# Altium PCB ValentinesFlower.PcbDoc
Units mm, origin at the board's own origin, x right, y up, seen from the top; angles counter-clockwise.
Board outline 50 x 40 mm, 2 copper layers (Top Layer, Bottom Layer); 15 components, 14 nets, 113 pads, 9 vias.
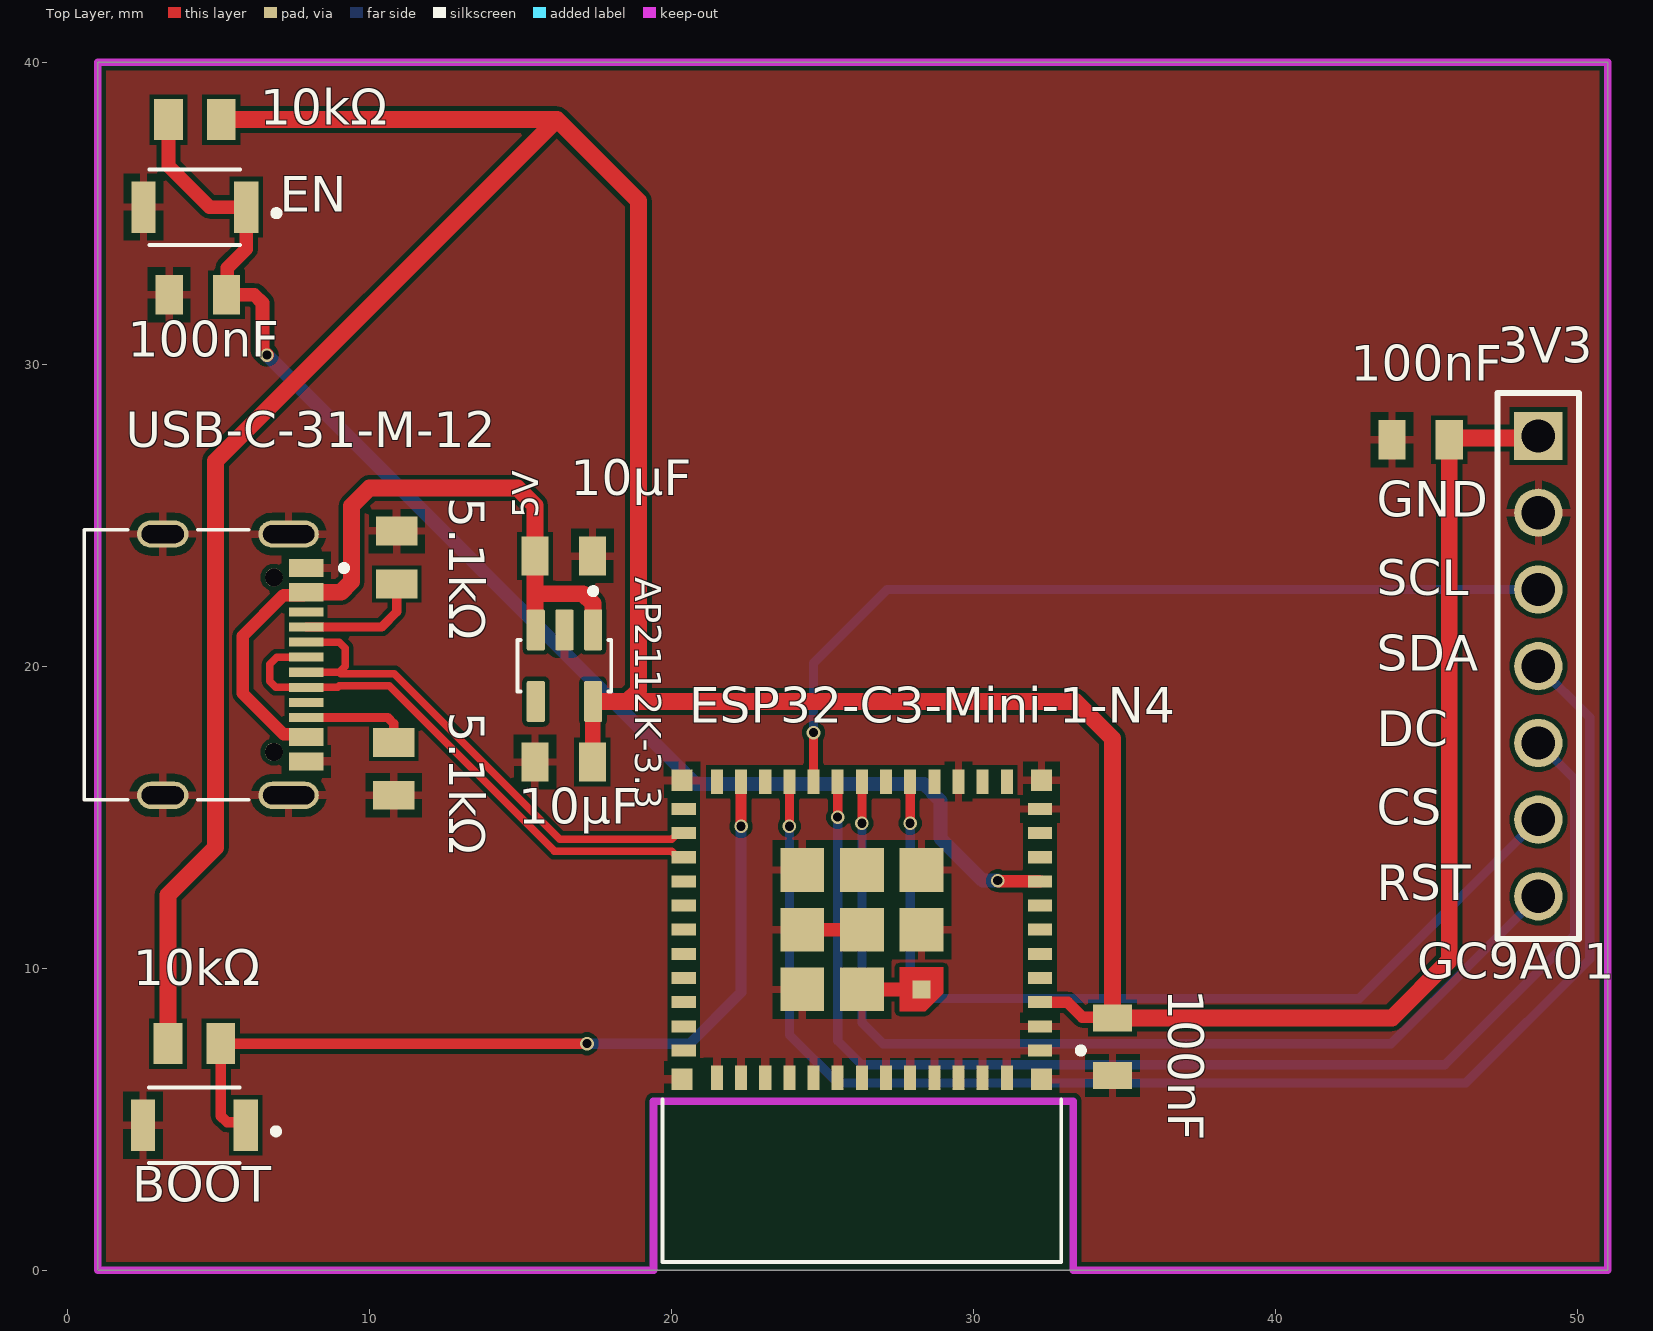
[diagram p0: Top Layer view]
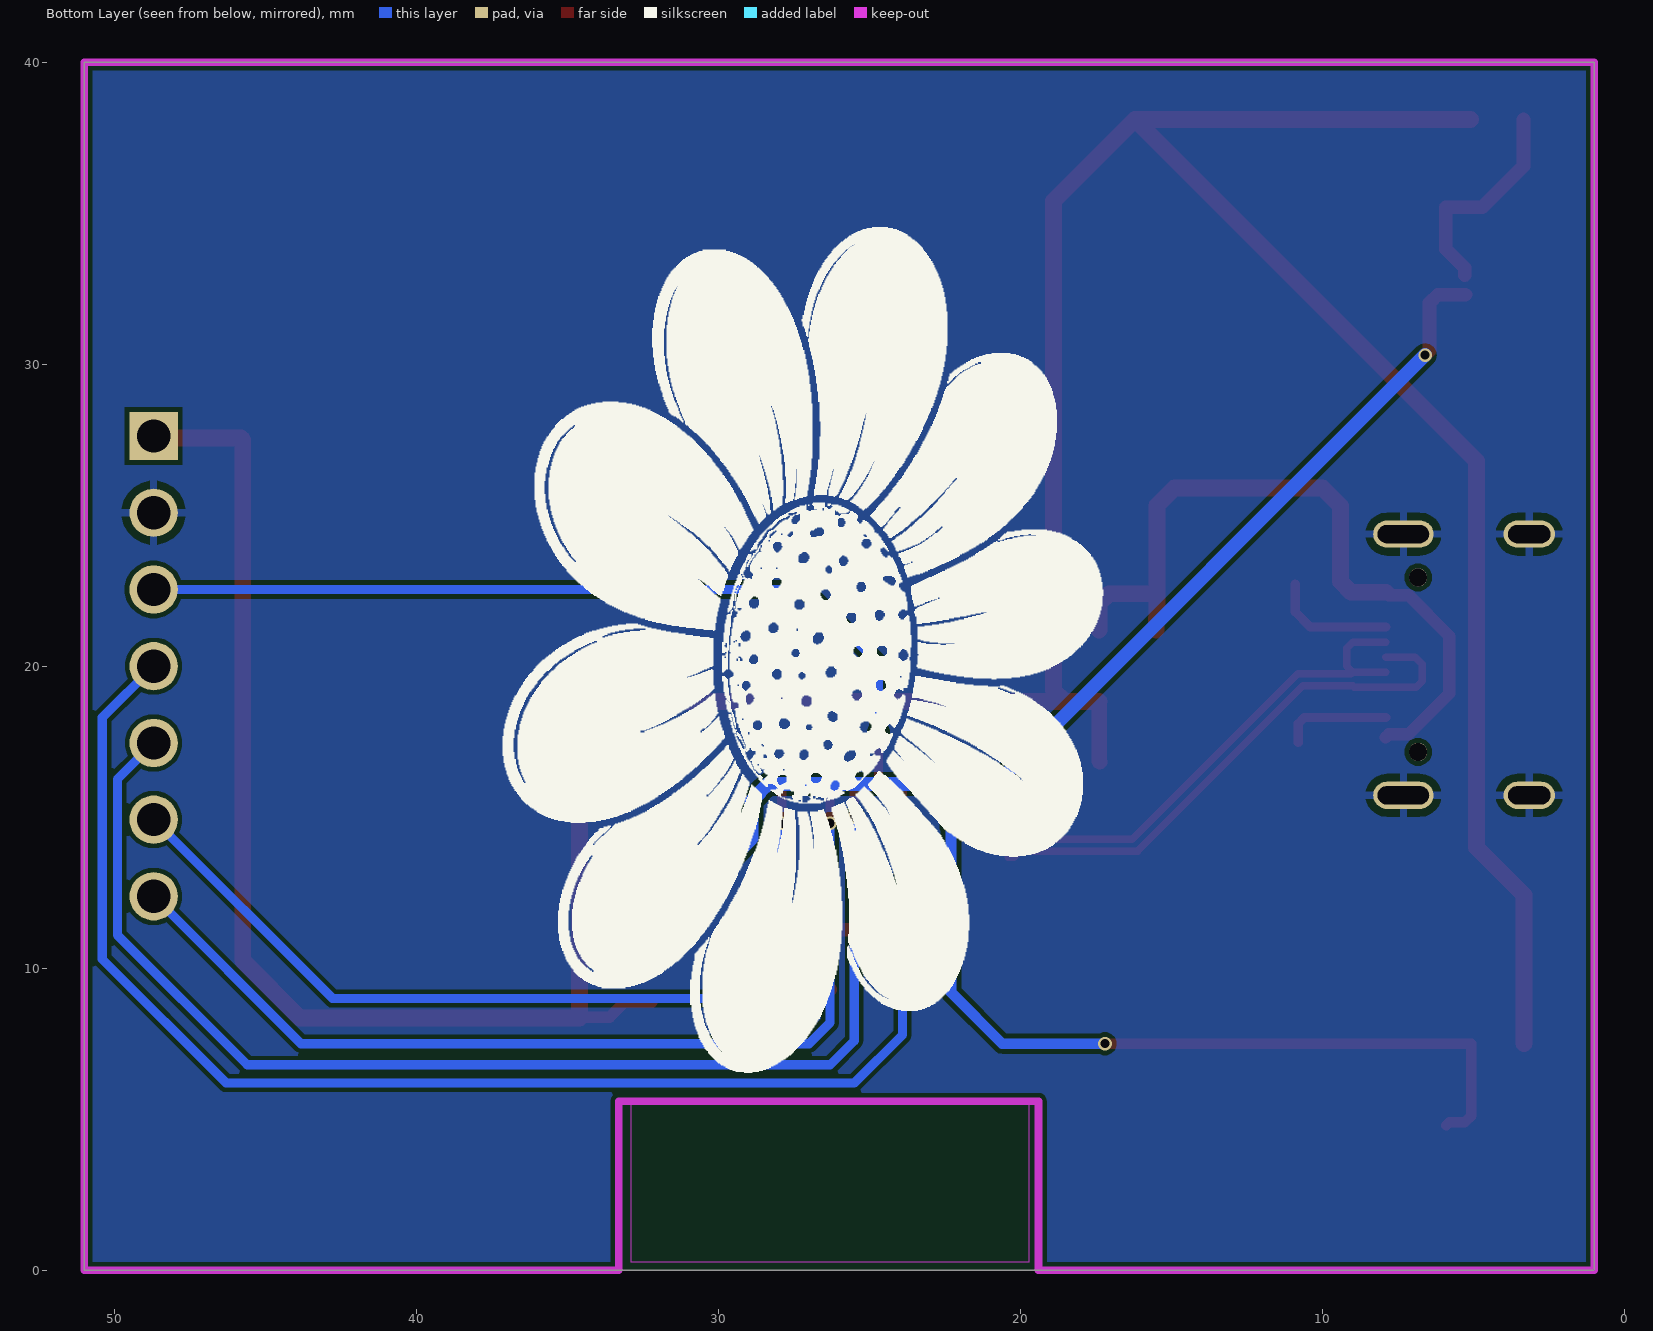
[diagram p1: Bottom Layer view, seen from below]
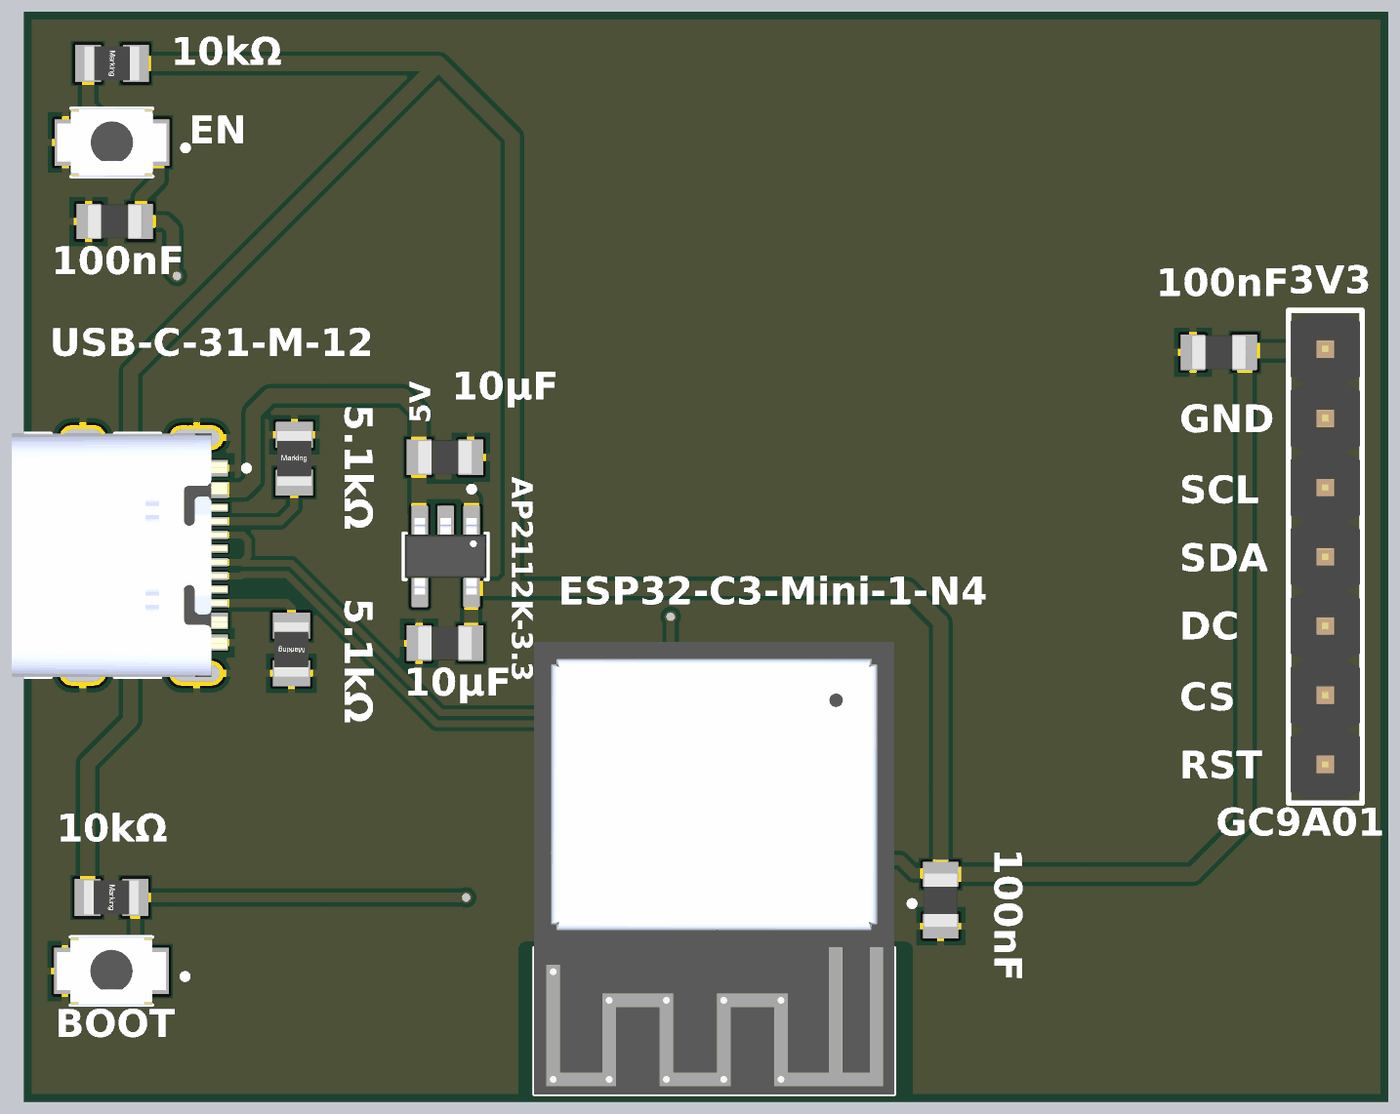
[diagram p2: 3D render of the assembled board from above, using the file's embedded part models]

## Layer stack, top to bottom
Top Solder: solder mask 0.0102, Solder Resist, Dk 3.5
Top Layer: signal copper 0.0356
Dielectric 1: dielectric 0.32, FR-4, Dk 4.8
Bottom Layer: signal copper 0.0356
Bottom Solder: solder mask 0.0102, Solder Resist, Dk 3.5

## Board outline
1,0 51,0 51,40 1,40

## Design rules (kind name [scope] priority, off if disabled: settings)
Clearance [All] p1: gap=0.15 ignorepadtopadclearanceinfootprint=FALSE
DiffPairsRouting [All] p1: maxlimit=0.15 minlimit=0.15 mostfreqgap=0.15 toplayer_minwidth=0.25 toplayer_maxwidth=0.25 toplayer_prefwidth=0.25 bottomlayer_minwidth=0.25 bottomlayer_maxwidth=0.25 bottomlayer_prefwidth=0.25 maxuncoupledlength=12.7
HoleToHoleClearance [All] p1: gap=0.2 allowstackedmicrovias=TRUE
MinimumSolderMaskSliver [All] p1: minsoldermaskwidth=0.1
PolygonConnect [All] p1: connectstyle=Relief reliefconductorwidth=0.254 reliefentries=4 polygonreliefangle="90 Angle" airgapwidth=0.254
RoutingVias [All] p1: holewidth=0.3 width=0.45 viastyle="Through Hole" minholewidth=0.3 minwidth=0.45 maxholewidth=0.45 maxwidth=0.7
SolderMaskExpansion [All] p1: expansion=0.102 istentingtop=FALSE
SupplyNets "Schematic Supply Nets_2" [InNet('3V3')] p1: voltage=0.000
SupplyNets "Schematic Supply Nets_1" [InNet('GND')] p2: voltage=0.000
SupplyNets "Schematic Supply Nets" [InNet('5V')] p3: voltage=0.000
Width [All] p1: maxlimit=0.559 minlimit=0.102 preferedwidth=0.203
27 further rules are at their usual default settings.

## Classes and differential pairs
component class ValentinesFlower: 5.1kΩ 10kΩ 10µF 100nF AP2112K-3.3 BOOT EN GC9A01 USB-C-31-M-12
differential pair USB: +USB_P -USB_N

## Components (designator, comment, footprint, x,y, rotation, side; value= is the part's Value field where it differs from the comment)
5.1kΩ "5.1k" WRIS-PSMB_0805_H=0.35mm 10.9,23.6 r270 top (schematic designator R4)
5.1kΩ "5.1k" WRIS-PSMB_0805_H=0.35mm 10.8,16.6 r90 top (schematic designator R3)
10kΩ "10k" WRIS-PSMB_0805_H=0.35mm 4.2,7.5 r180 top (schematic designator R2)
10kΩ "10k" WRIS-PSMB_0805_H=0.35mm 4.216,38.1 r180 top (schematic designator R1)
10µF "10µF" WCAP-CSGP_0805_H=0.6mm_Reflow 16.426,16.83 r0 top (schematic designator C2)
10µF "10µF" WCAP-CSGP_0805_H=0.6mm_Reflow 16.426,23.652 r180 top (schematic designator C1)
100nF "100nF" WCAP-CSGP_0805_H=0.6mm_Reflow 4.316,32.3 r0 top (schematic designator C5)
100nF "100nF" WCAP-CSGP_0805_H=0.6mm_Reflow 44.8,27.5 r0 top (schematic designator C4)
100nF "100nF" WCAP-CSGP_0805_H=0.6mm_Reflow 34.6,7.4 r90 top (schematic designator C3)
AP2112K-3.3 "AP2112K-3.3TRG1" SOT95P285X140-5N 16.453,20.015 r270 top (schematic designator U2)
BOOT "B3U-1000P" SW_B3U-1000P 4.2,4.8 r180 top (schematic designator S2)
EN "B3U-1000P" SW_B3U-1000P 4.216,35.2 r180 top (schematic designator S1)
ESP32-C3-Mini-1-N4 "ESP32-C3-MINI-1-N4" XCVR_ESP32-C3-MINI-1-N4 26.3,8.575 r180 top (schematic designator U1)
GC9A01 "GC9A01 SPI" 61300711121 48.7,20 r270 top (schematic designator P1)
USB-C-31-M-12 "TYPE-C-31-M-12" HRO_TYPE-C-31-M-12 3.15,20.05 r270 top (schematic designator J1)

## Footprints (in the part's own frame and the unit in brackets; to place one, negate y for a bottom-side part, rotate by r counter-clockwise, add the part's x,y. Pads: shape width x height; smd on the part's side, far side on the other; paste and mask are expansions set on the pad)
61300711121 [mm] "Pin Header, pitch 2.54 mm, THT, Vertical, single row, 7p"
  rect 1.6x1.6 hole 1.1: 1(-7.62,0)
  round 1.6 hole 1.1: 2(-5.08,0) 3(-2.54,0) 4(0,0) 5(2.54,0) 6(5.08,0) 7(7.62,0)
  silkscreen extent -9.04,-1.35 9.04,1.35, body extent -8.89,-1.27 8.89,1.27, height 8.57
HRO_TYPE-C-31-M-12 [mm]
  rect 0.6x1.14 smd mask+0.05: A1_B12(-3.2,4.75) A4_B9(-2.4,4.75) B1_A12(3.2,4.75) B4_A9(2.4,4.75)
  rect 0.3x1.14 smd mask+0.05: A5(-1.25,4.75) A6(-0.25,4.75) A7(0.25,4.75) A8(1.25,4.75) B5(1.75,4.75) B6(0.75,4.75) B7(-0.75,4.75) B8(-1.75,4.75)
  oval 0.9x2 hole 0.6 slot 1.7 at 90 deg: S1(-4.325,4.17) S2(4.325,4.17)
  oval 0.9x1.7 hole 0.6 slot 1.4 at 90 deg: S3(-4.325,0) S4(4.325,0)
  round 0.6 hole 0.6 unplated: ""(-2.89,3.68) ""(2.89,3.68)
  silkscreen extent -4.47,-2.6 4.47,6.1, body extent -4.47,-2.6 4.47,5.31, height 3.31
SOT95P285X140-5N [mm]
  rrect15% 1.35x0.6 smd: 1(-1.185,0.95) 2(-1.185,0) 3(-1.185,-0.95) 4(1.185,-0.95) 5(1.185,0.95)
  silkscreen extent -2.57,-1.55 0.85,1.55, body extent -1.4,-1.5 1.4,1.5, height 1.4
SW_B3U-1000P [mm]
  rect 0.8x1.7 smd: 1(-1.7,0) 2(1.7,0)
  silkscreen extent -2.8,-1.25 1.5,1.25, body extent -2,-1.25 2,1.25, height 1.75
WCAP-CSGP_0805_H=0.6mm_Reflow [mm] "Ceramic Capacitors, body 2x1.25mm"
  rect 0.9x1.3 smd: 1(-0.95,0) 2(0.95,0)
  body extent -1,-0.62 1,0.63, height 0.6
WRIS-PSMB_0805_H=0.35mm [mm] "Metal Plate Resistor, SMT, body size 2x1.25mm"
  rect 0.95x1.36 smd: 1(-0.875,0) 2(0.875,0)
  body extent -1,-0.62 1,0.63, height 0.35
XCVR_ESP32-C3-MINI-1-N4 [mm]
  rect 0.8x0.4 smd: 1(-5.9,1.3) 2(-5.9,0.5) 3(-5.9,-0.3) 4(-5.9,-1.1) 5(-5.9,-1.9) 6(-5.9,-2.7) 7(-5.9,-3.5) 8(-5.9,-4.3) 9(-5.9,-5.1) 10(-5.9,-5.9) 11(-5.9,-6.7) 25(5.9,-6.7) 26(5.9,-5.9) 27(5.9,-5.1) 28(5.9,-4.3) 29(5.9,-3.5) 30(5.9,-2.7) 31(5.9,-1.9) 32(5.9,-1.1) 33(5.9,-0.3) 34(5.9,0.5) 35(5.9,1.3)
  rect 0.4x0.8 smd: 12(-4.8,-7.6) 13(-4,-7.6) 14(-3.2,-7.6) 15(-2.4,-7.6) 16(-1.6,-7.6) 17(-0.8,-7.6) 18(0,-7.6) 19(0.8,-7.6) 20(1.6,-7.6) 21(2.4,-7.6) 22(3.2,-7.6) 23(4,-7.6) 24(4.8,-7.6) 36(4.8,2.2) 37(4,2.2) 38(3.2,2.2) 39(2.4,2.2) 40(1.6,2.2) 41(0.8,2.2) 42(0,2.2) 43(-0.8,2.2) 44(-1.6,2.2) 45(-2.4,2.2) 46(-3.2,2.2) 47(-4,2.2) 48(-4.8,2.2)
  rect 0.6x0.6 smd paste-1 mask+0: 49_1(-1.975,-0.725)
  rect 1.45x1.45 smd: 49_2(0,-0.725) 49_3(1.975,-0.725) 49_4(1.975,-2.7) 49_5(1.975,-4.675) 49_6(0,-4.675) 49_7(-1.975,-4.675) 49_8(-1.975,-2.7) 49_9(0,-2.7)
  rect 0.7x0.7 smd: 50(5.95,2.25) 51(5.95,-7.65) 52(-5.95,-7.65) 53(-5.95,2.25)
  Top Layer region: -1.25,-1.45 -2.7,-1.45 -2.7,-0.6 -2.1,0 -1.25,0
  Keep-Out Layer region: 6.6,2.9 -6.6,2.9 -6.6,8.3 6.6,8.3
  Keep-Out Layer region: 6.6,2.9 -6.6,2.9 -6.6,8.3 6.6,8.3
  silkscreen extent -7.35,1.2 6.6,8.3, body extent -6.6,-8.3 6.6,8.3, height 2.55

## Part data
5.1kΩ 5.1kΩ 10kΩ 10kΩ: library part 580060720003, "WRIS-PSMB Metal Plate Resistors, size 0805, 5mOhm, +/-1%, 0.5W", Operating Temperature="-55 to +155degC", Rated Current=10A, Rated Power=0.5W, Resistance=5mOhm, Resistance Tolerance=+/-1%, Temperature Coefficient of Resistance=+/-100ppm/degC, ComponentLink1Description=Manufacturer, ComponentLink1URL=http://www.we-online.de, ComponentLink2Description=Datasheet, ComponentLink2URL=https://katalog.we-online.com/pbs/datasheet/580060720003.pdf, Height=0.35mm, Length=2mm, Mounting Technology=SMT, Packaging="Tape and Reel", Part Number=580060720003, Published Date="September 2019", Publisher="Wurth Elektronik", Size=0805, Technical Reference=MB0805R005F102KAATP0000, Width=1.25mm
10µF 10µF 100nF 100nF 100nF: library part 885012007059, "WCAP-CSGP General Purpose Ceramic Capacitors, size 0805, 220pF, +/-5%, 50VDC", Capacitance=220pF, Capacitance Tolerance=+/-5%, Isolation Resistance=>=10GOhm, Operating Temperature="-55 to +125degC", Rated Voltage=50VDC, Ceramic Type=NP0, ComponentLink1Description=Manufacturer, ComponentLink1URL=http://www.we-online.de, ComponentLink2Description=Datasheet, ComponentLink2URL=https://katalog.we-online.com/pbs/datasheet/885012007059.pdf, Dissipation Factor=Q>=1000, Height="0.6mm +/-0.10mm", Mounting Technology=SMD, Packaging="Tape and Reel", Part Number=885012007059, Published Date="August 2019", Publisher="Wurth Elektronik", Size=0805, Technical Reference=NP00805221J050DFCT10000
AP2112K-3.3: "Linear Voltage Regulator IC Positive Fixed 1 Output 600mA SOT-25", Package="SOT-753 Diodes Inc.", Availability="In Stock", Check_prices=https://www.snapeda.com/parts/AP2112K-3.3TRG1/Diodes+Inc./view-part/?ref=eda, MF="Diodes Inc.", MP=AP2112K-3.3TRG1, Price=None, Purchase-URL=https://pricing.snapeda.com/search/part/AP2112K-3.3TRG1/?ref=eda, SnapEDA_Link=https://www.snapeda.com/parts/AP2112K-3.3TRG1/Diodes+Inc./view-part/?ref=snap
BOOT EN: "Switch Tactile N.O. SPST Round Button Gull Wing 0.05A 12VDC 1.5N SMD Embossed T/R", Package=None, Availability=Unavailable, MP=B3U-1000P, Price=None
ESP32-C3-Mini-1-N4: Package=None, Availability=Unavailable, MF="{'manufacturer': u'Espressif Systems'}", MP=ESP32-C3-MINI-1-N4, Price=None
GC9A01: library part 61300711121, "WR-PHD Pin Header, THT, pitch 2.54mm, Single Row, Vertical, 7p", Contact Resistance=20mOhm, Manufacturer="Wurth Elektronik", Operating Temperature="-40 to +105degC", Rated Current=3A, Withstanding Voltage=500VAC, Working Voltage=250VAC, ComponentLink1Description=Manufacturer, ComponentLink1URL=http://www.we-online.de, ComponentLink2Description=Datasheet, ComponentLink2URL=https://www.we-online.com/catalog/datasheet/61300711121.pdf, Gender="Pin Header", Manufacturer Part Number=61300711121, Mounting Technology=THT, Orientation=Vertical, Packaging=Bag, Pin Number=7, Pitch=2.54mm, Published Date="May 2020", Row Number=Single
USB-C-31-M-12: "USB Connectors 24 Receptacle 1 8.94*7.3mm RoHS", Package=Package, Check_prices=https://www.snapeda.com/parts/TYPE-C-31-M-12/HRO+Electronics+Co.%252C+Ltd./view-part/?ref=eda, MF="HRO Electronics Co., Ltd.", MP=TYPE-C-31-M-12, SnapEDA_Link=https://www.snapeda.com/parts/TYPE-C-31-M-12/HRO+Electronics+Co.%252C+Ltd./view-part/?ref=snap

## Via types
v1: diameter 0.45, hole 0.3, Top Layer to Bottom Layer, tented both sides, 9 vias

## Nets (pads, with @x,y where several pads share a name; then routed paths per layer and width w, separated by ;. In a path a pad name is that pad's centre, name@x,y a point inside that pad or via, vN(x,y) a via of type N, cw(c..) or ccw(c..) an arc to the next point about the centre after c; other vN are vias at no path point)
3V3: 10kΩ.1@5.091,38.1 10kΩ.2@3.325,7.5 10µF.2@17.376,16.83 100nF.2@34.6,8.35 100nF.2@45.75,27.5 AP2112K-3.3.5 ESP32-C3-Mini-1-N4.3 GC9A01.1 | length 131.4
  Top Layer w0.381: ESP32-C3-Mini-1-N4.3 33.11,8.875 33.602,8.383 34.567,8.383 100nF.2@34.6,8.35
  Top Layer w0.508: 10µF.2@17.376,16.83 17.39,16.844 17.39,18.816 AP2112K-3.3.5
  Top Layer w0.559: 10kΩ.2@3.325,7.5 3.325,12.425 4.9,14 4.9,26.8 16.2,38.1 ; 10kΩ.1@5.091,38.1 16.2,38.1 ; AP2112K-3.3.5 18.53,18.83 ; GC9A01.1 48.64,27.56 45.81,27.56 45.75,27.5 45.75,10.25 43.85,8.35 34.6,8.35 34.6,17.6 33.37,18.83 18.53,18.83 ; 16.2,38.1 18.9,35.4 18.9,19.2 18.53,18.83
5V: 10µF.2@15.476,23.652 AP2112K-3.3.1 AP2112K-3.3.3 USB-C-31-M-12.A4_B9 USB-C-31-M-12.B4_A9 | length 25.1
  Top Layer w0.406: USB-C-31-M-12.B4_A9 7.803,17.747 7.153,17.747 5.8,19.1 5.8,21 7.153,22.353 7.803,22.353 USB-C-31-M-12.A4_B9
  Top Layer w0.559: USB-C-31-M-12.A4_B9 9.05,22.45 9.4,22.8 9.4,25.3 10,25.9 14.9,25.9 15.476,25.324 15.476,23.652 15.476,22.4 ; AP2112K-3.3.3 15.503,21.575 15.476,21.602 15.476,22.4 ; AP2112K-3.3.1 17.4,21.203 17.4,22.073 17.073,22.4 15.476,22.4
CS: ESP32-C3-Mini-1-N4.16 GC9A01.6 | length 30.1
  Top Layer w0.305: v1(27.9,14.8) ESP32-C3-Mini-1-N4.16
  Bottom Layer w0.305: v1(27.9,14.8) 27.9,9.6 28.5,9 42.78,9 GC9A01.6
DC: ESP32-C3-Mini-1-N4.19 GC9A01.5 | length 41.9
  Top Layer w0.305: v1(25.5,15) ESP32-C3-Mini-1-N4.19
  Bottom Layer w0.305: v1(25.5,15) 25.5,7.6 26.3,6.8 45.6,6.8 49.9,11.1 49.9,16.26 GC9A01.5
GND: 5.1kΩ.1 10µF.1 100nF.1 AP2112K-3.3.2 BOOT.2 EN.2 ESP32-C3-Mini-1-N4.1 ESP32-C3-Mini-1-N4.2 ESP32-C3-Mini-1-N4.11 ESP32-C3-Mini-1-N4.14 ESP32-C3-Mini-1-N4.36 ESP32-C3-Mini-1-N4.37 ESP32-C3-Mini-1-N4.38 ESP32-C3-Mini-1-N4.39 ESP32-C3-Mini-1-N4.40 ESP32-C3-Mini-1-N4.41 ESP32-C3-Mini-1-N4.42 ESP32-C3-Mini-1-N4.43 ESP32-C3-Mini-1-N4.44 ESP32-C3-Mini-1-N4.45 ESP32-C3-Mini-1-N4.46 ESP32-C3-Mini-1-N4.47 ESP32-C3-Mini-1-N4.48 ESP32-C3-Mini-1-N4.49_1 ESP32-C3-Mini-1-N4.49_2 ESP32-C3-Mini-1-N4.49_3 ESP32-C3-Mini-1-N4.49_4 ESP32-C3-Mini-1-N4.49_5 ESP32-C3-Mini-1-N4.49_6 ESP32-C3-Mini-1-N4.49_7 ESP32-C3-Mini-1-N4.49_8 ESP32-C3-Mini-1-N4.49_9 ESP32-C3-Mini-1-N4.50 ESP32-C3-Mini-1-N4.51 ESP32-C3-Mini-1-N4.52 ESP32-C3-Mini-1-N4.53 GC9A01.2 USB-C-31-M-12.A1_B12 USB-C-31-M-12.B1_A12 USB-C-31-M-12.S1 USB-C-31-M-12.S2 USB-C-31-M-12.S3 USB-C-31-M-12.S4 | length 3.9
  Top Layer w0.457: ESP32-C3-Mini-1-N4.49_4 ESP32-C3-Mini-1-N4.49_9 ; ESP32-C3-Mini-1-N4.49_2 ESP32-C3-Mini-1-N4.49_1
NetC5_2: 10kΩ.2@3.341,38.1 100nF.2@5.266,32.3 EN.1 ESP32-C3-Mini-1-N4.8 | length 43.8
  Top Layer w0.406: v1(30.8,12.9) 30.812,12.9 30.837,12.875 ESP32-C3-Mini-1-N4.8
  Top Layer w0.457: 10kΩ.2@3.341,38.1 3.341,36.559 4.7,35.2 5.744,35.2 EN.1 5.916,33.816 5.285,33.185 100nF.2@5.285,32.943 ; 100nF.2@5.266,32.3 6.182,32.3 6.45,32.032 6.45,30.45 v1(6.6,30.3)
  Bottom Layer w0.457: v1(6.6,30.3) 20.8,16.1 28.364,16.1 28.632,15.832 28.632,15.8 28.9,15.532 28.9,14.3 30.3,12.9 v1(30.8,12.9)
NetJ1_A5: 5.1kΩ.2@10.9,22.725 USB-C-31-M-12.A5 | length 4.1
  Top Layer w0.305: USB-C-31-M-12.A5 10.4,21.3 10.9,21.8 5.1kΩ.2@10.9,22.725
NetJ1_B5: 5.1kΩ.2@10.8,17.475 USB-C-31-M-12.B5 | length 3.6
  Top Layer w0.305: USB-C-31-M-12.B5 10.6,18.3 10.8,18.1 5.1kΩ.2@10.8,17.475
NetR2_1: 10kΩ.1@5.075,7.5 BOOT.1 ESP32-C3-Mini-1-N4.23 | length 28.2
  Top Layer w0.356: BOOT.1 5.8,4.9 5.283,4.9 5.075,5.108 5.075,7.5 v1(17.2,7.5) ; v1(22.3,14.7) ESP32-C3-Mini-1-N4.23
  Bottom Layer w0.356: v1(17.2,7.5) 20.6,7.5 22.3,9.2 v1(22.3,14.7)
RST: ESP32-C3-Mini-1-N4.18 GC9A01.7 | length 32.7
  Top Layer w0.305: v1(26.3,14.8) ESP32-C3-Mini-1-N4.18
  Bottom Layer w0.305: v1(26.3,14.8) 26.3,8.2 27,7.5 43.82,7.5 GC9A01.7
SCL: ESP32-C3-Mini-1-N4.20 GC9A01.3 | length 28.9
  Top Layer w0.305: ESP32-C3-Mini-1-N4.20 v1(24.7,17.8)
  Bottom Layer w0.305: v1(24.7,17.8) 24.7,20.1 27.14,22.54 GC9A01.3
SDA: ESP32-C3-Mini-1-N4.21 GC9A01.4 | length 47.6
  Top Layer w0.305: v1(23.9,14.7) ESP32-C3-Mini-1-N4.21
  Bottom Layer w0.305: v1(23.9,14.7) 23.9,7.8 25.5,6.2 46.3,6.2 50.4,10.3 50.4,18.3 GC9A01.4
USB_N: ESP32-C3-Mini-1-N4.26 USB-C-31-M-12.A7 USB-C-31-M-12.B7 | length 17.1
  Top Layer w0.25: USB-C-31-M-12.A7 9,19.8 ; USB-C-31-M-12.B7 9,20.8 9.2,20.6 9.2,20 9,19.8 ; ESP32-C3-Mini-1-N4.26 20.2,14.475 20,14.275 16.289,14.275 10.814,19.75 9.05,19.75 9,19.8
USB_P: ESP32-C3-Mini-1-N4.27 USB-C-31-M-12.A6 USB-C-31-M-12.B6 | length 18
  Top Layer w0.25: USB-C-31-M-12.A6 6.933,20.3 6.7,20.067 6.7,19.5 6.9,19.3 USB-C-31-M-12.B6 8.95,19.3 9,19.35 10.649,19.35 16.124,13.875 20,13.875 20.2,13.675 ESP32-C3-Mini-1-N4.27
pads on no net: AP2112K-3.3.4 ESP32-C3-Mini-1-N4.4 ESP32-C3-Mini-1-N4.5 ESP32-C3-Mini-1-N4.6 ESP32-C3-Mini-1-N4.7 ESP32-C3-Mini-1-N4.9 ESP32-C3-Mini-1-N4.10 ESP32-C3-Mini-1-N4.12 ESP32-C3-Mini-1-N4.13 ESP32-C3-Mini-1-N4.15 ESP32-C3-Mini-1-N4.17 ESP32-C3-Mini-1-N4.22 ESP32-C3-Mini-1-N4.24 ESP32-C3-Mini-1-N4.25 ESP32-C3-Mini-1-N4.28 ESP32-C3-Mini-1-N4.29 ESP32-C3-Mini-1-N4.30 ESP32-C3-Mini-1-N4.31 ESP32-C3-Mini-1-N4.32 ESP32-C3-Mini-1-N4.33 ESP32-C3-Mini-1-N4.34 ESP32-C3-Mini-1-N4.35 USB-C-31-M-12. USB-C-31-M-12.A8 USB-C-31-M-12.B8

## Polygon pours and split planes (outlines as drawn)
GND on Top Layer "GND_L01_P000" (solid, pour order 0): 1,40 51,40 51,0 1,0
GND on Bottom Layer "GND_L02_P001" (solid, pour order 1): 1,40 51,40 51,0 1,0

## Keep-outs
Keep-Out Layer:
  lines w0.254: 1,0 19.4,0 19.4,5.6 33.3,5.6 33.3,0 51,0 51,40 1,40 1,0

## Silkscreen, mask and mechanical layers (free items; w line width, h text height)
Top Overlay:
  text "3V3" at 47.35,29.668 h2
  text "5V" at 15.887,24.9 h1.5 r90
  text "GND" at 43.351,24.568 h2
  text "SCL" at 43.35,21.968 h2
  text "SDA" at 43.35,19.468 h2
  text "DC" at 43.35,16.968 h2
  text "CS" at 43.351,14.368 h2
  text "RST" at 43.35,11.868 h2
Bottom Overlay:
  drawing of 27 lines, arcs and shapes, not listed

## Text inside footprints (layer, text, board x,y; h text height)
USB-C-31-M-12: Mechanical 13 "PCB EDGE" at 1.25,14.85 h0.61 r270